# Altium PCB Electrode_Breakout.PcbDoc
Units mm, origin at the board's own origin, x right, y up, seen from the top; angles counter-clockwise.
Board outline 40.64 x 35.56 mm, 4 copper layers (Top, Ground Plane, Power Plane, Bottom), stack 1.562 mm thick; 7 components, 65 nets, 141 pads, 8 vias.
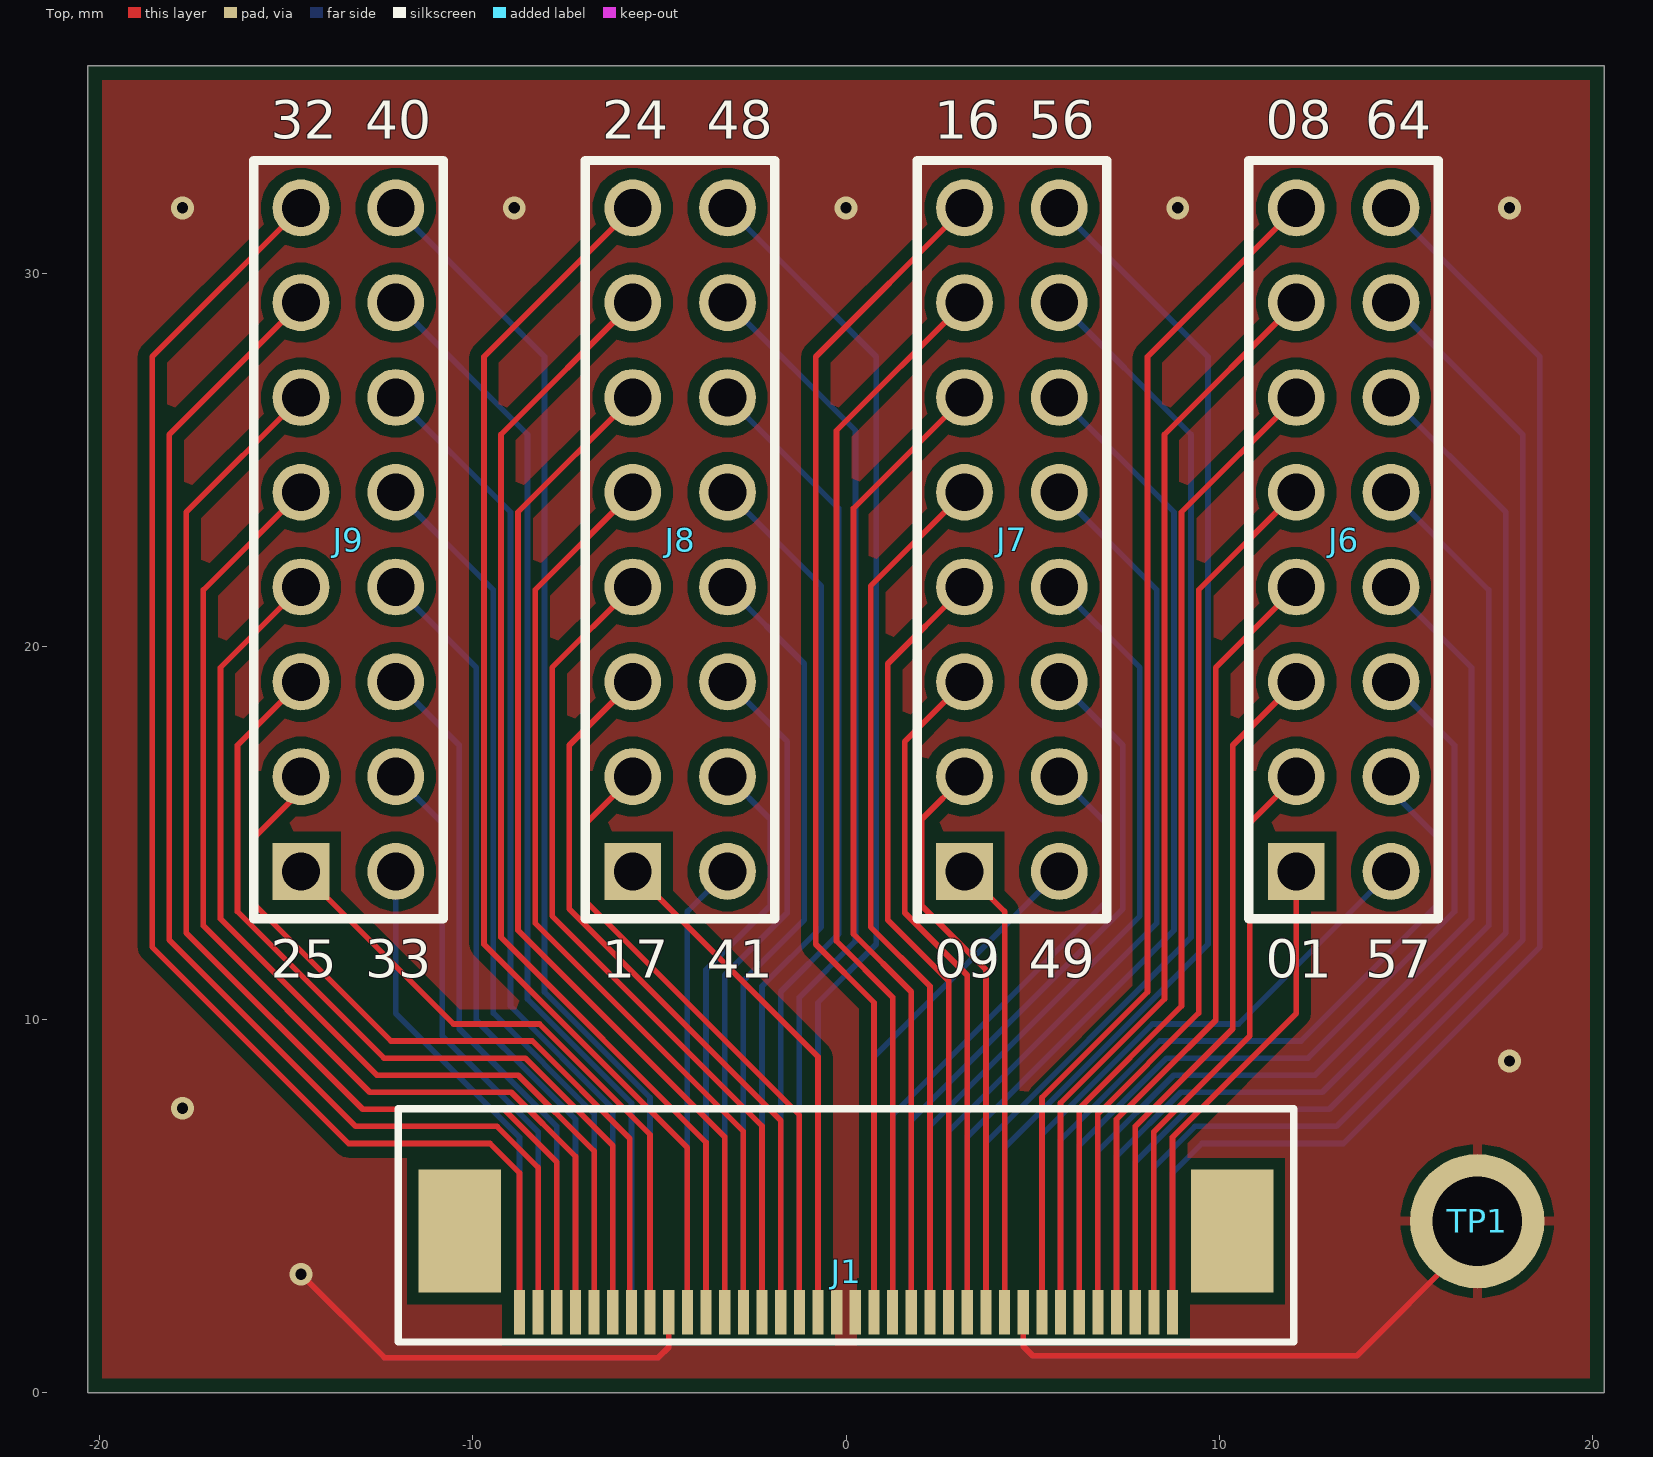
[diagram p0: Top view]
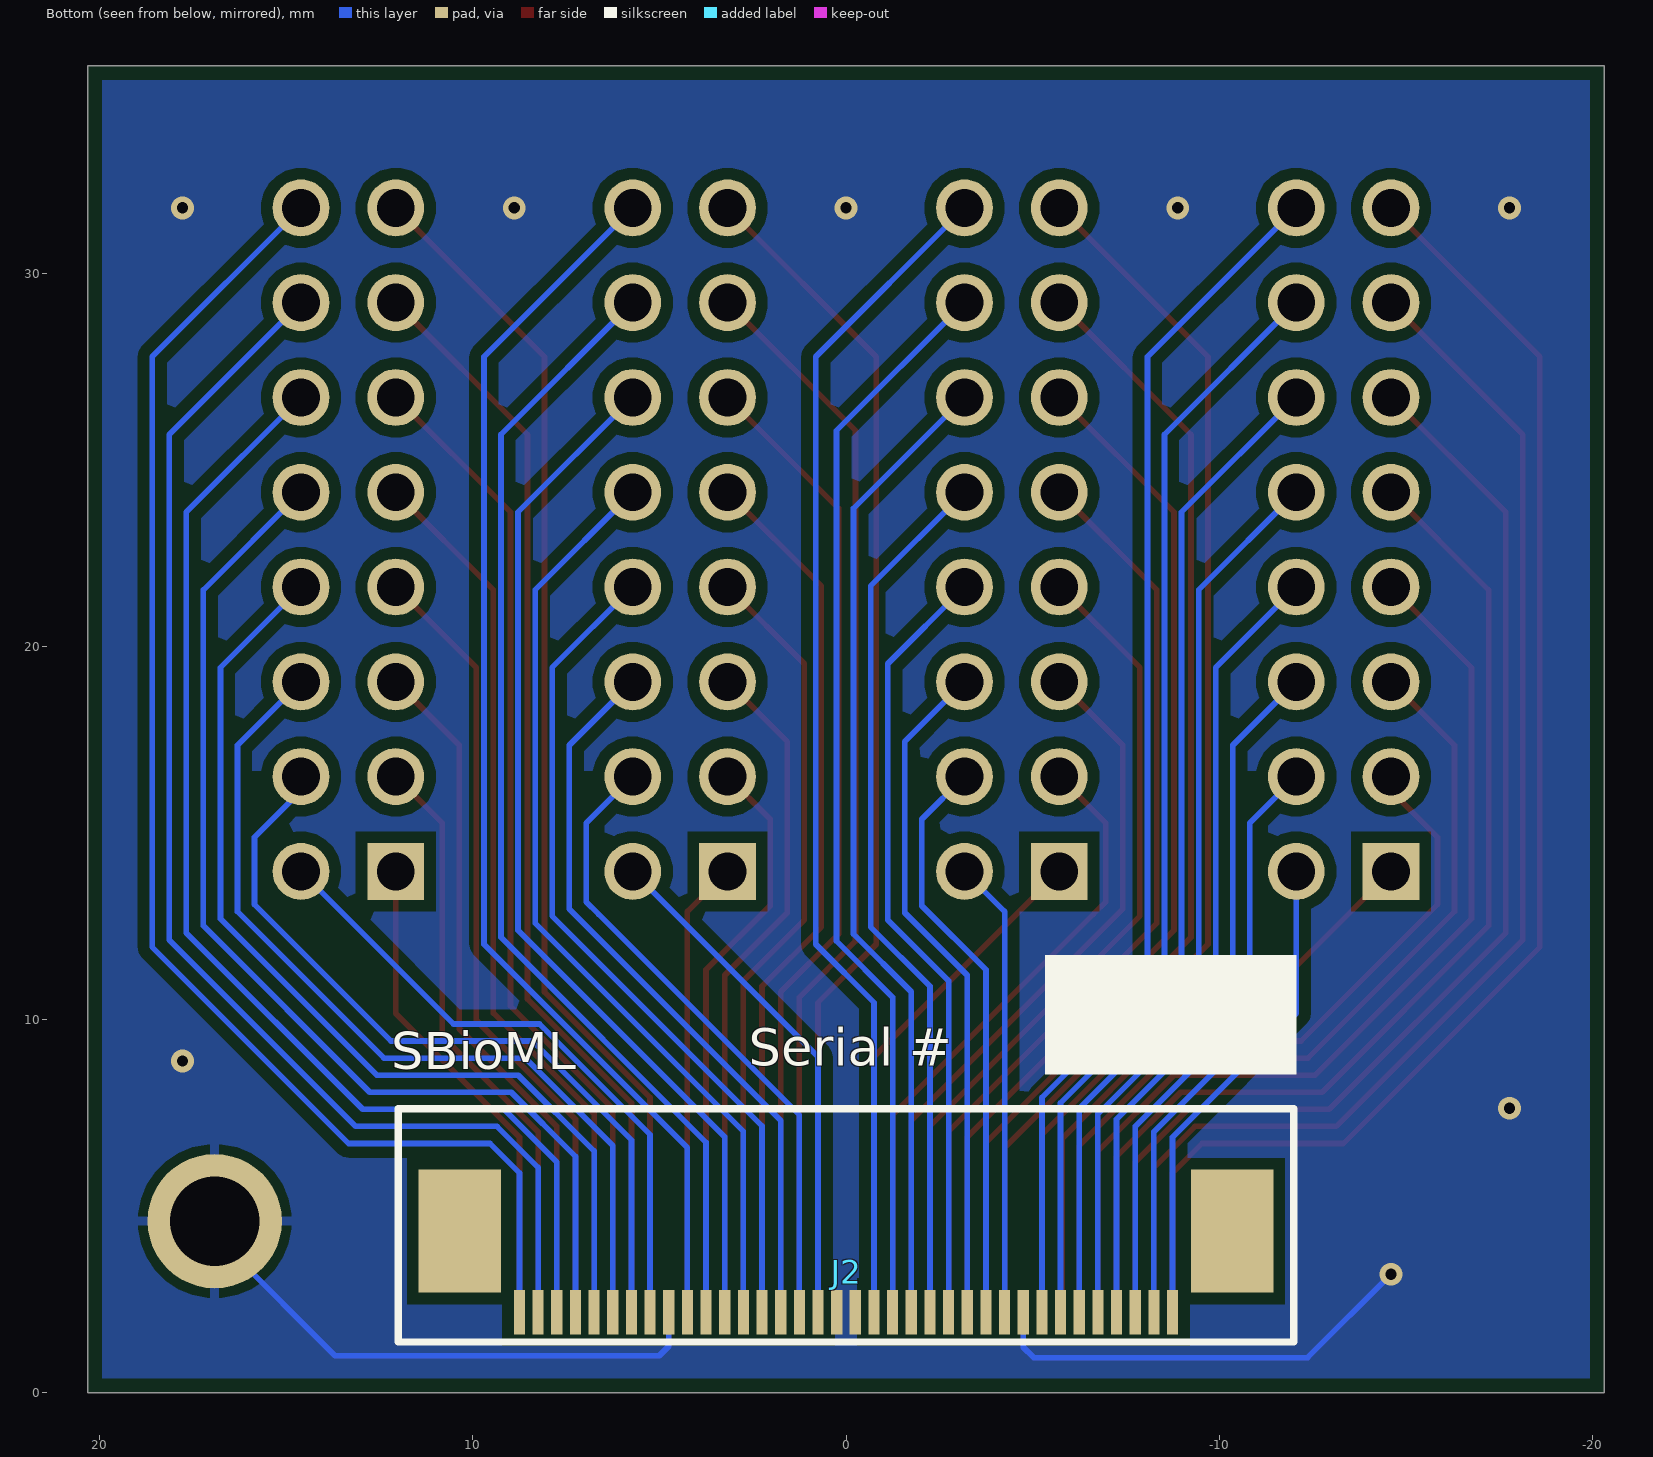
[diagram p1: Bottom view, seen from below]
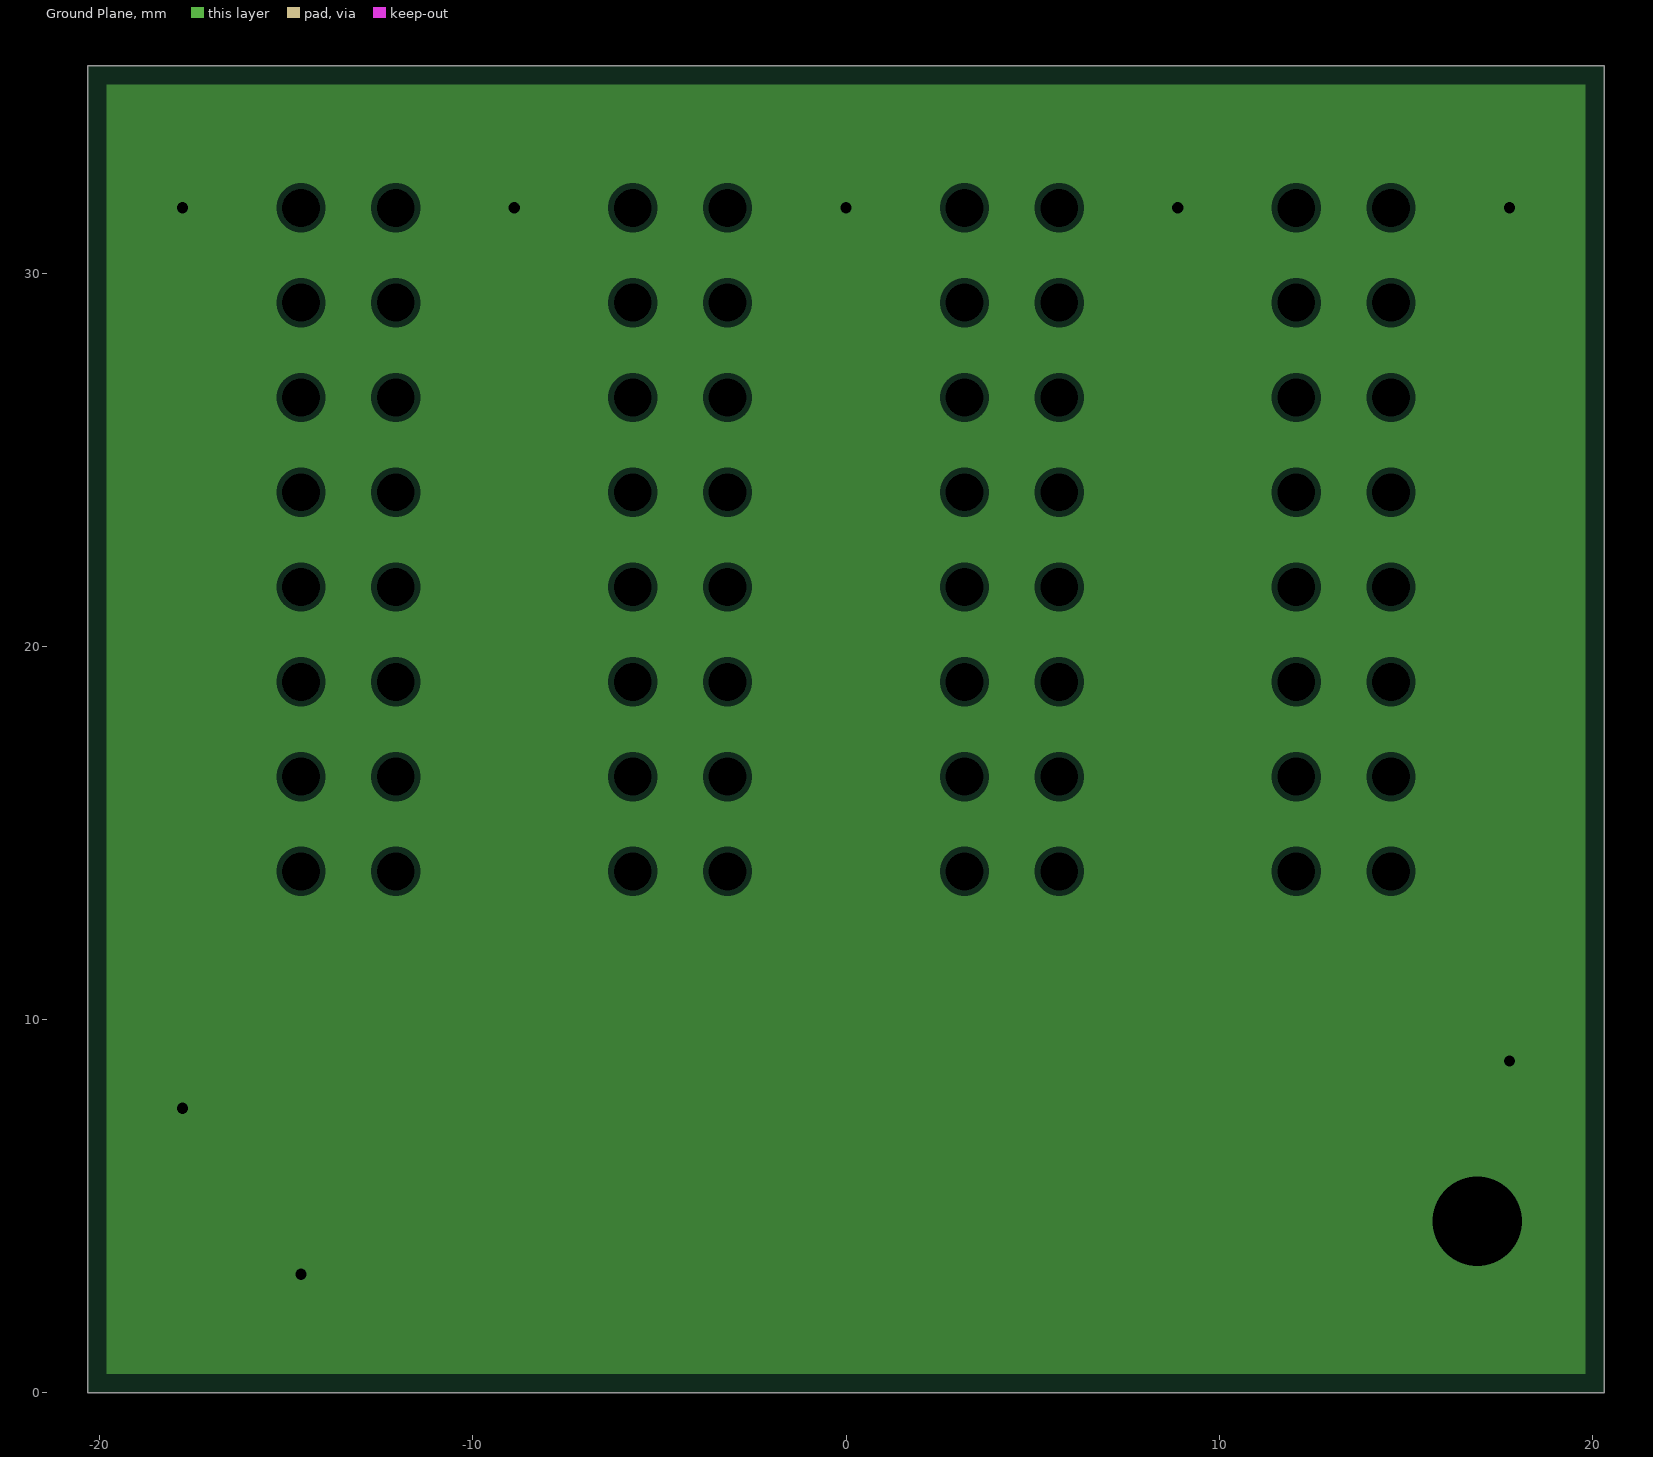
[diagram p2: Ground Plane, clearances drawn from the general rule]
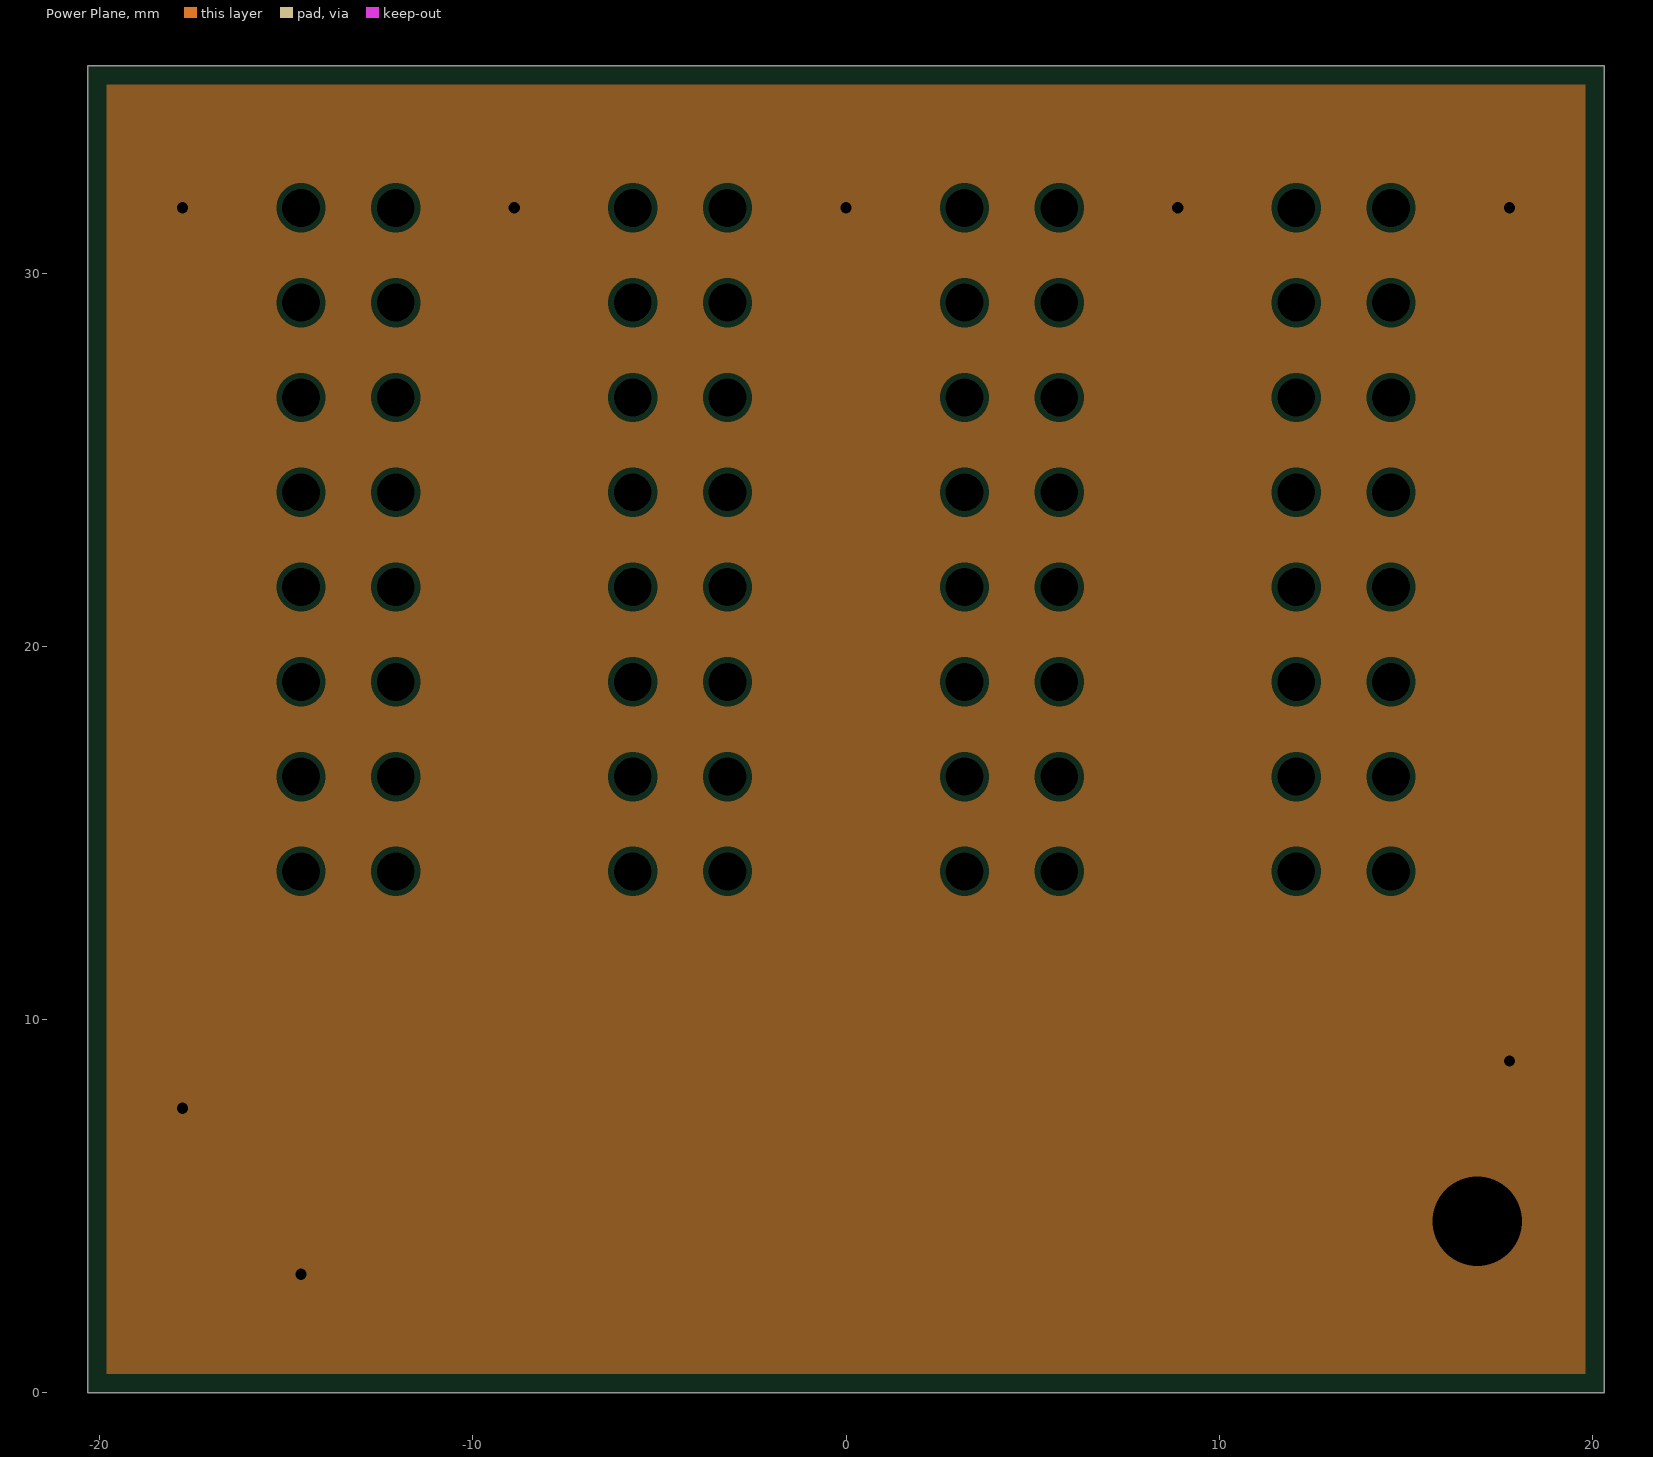
[diagram p3: Power Plane, clearances drawn from the general rule]

## Layer stack, top to bottom
Top Solder: solder mask 0.0102, Solder Resist, Dk 3.5
Top: signal copper 0.035
Dielectric 1: prepreg 0.196, FR-4, Dk 4.74
Ground Plane: plane copper 0.035, net REF
Dielectric 3: core 1.03, Dk 4.6
Power Plane: plane copper 0.035, net REF
Dielectric 4: prepreg 0.196, Dk 4.74
Bottom: signal copper 0.035
Bottom Solder: solder mask 0.0102, Solder Resist, Dk 3.5

## Board outline
-20.32,0 -20.32,35.56 20.32,35.56 20.32,0

## Design rules (kind name [scope] priority, off if disabled: settings)
BoardOutlineClearance [All] p1: gap=0.381 ignorepadtopadclearanceinfootprint=FALSE
Clearance [All] p1: gap=0.305 ignorepadtopadclearanceinfootprint=TRUE except(0.102: SMDPad-SMDPad; 0.203: Arc-SMDPad Track-SMDPad)
ComponentClearance [All] p1: gap=0.102 collisioncheckmode=3 verticalgap=0.102 showdistances=FALSE
HoleSize [All] p1: absolutevalues=TRUE maxlimit=25.4 minlimit=0.102 maxpercent=80.000 minpercent=20.000
HoleToHoleClearance [All] p1: gap=0.254 allowstackedmicrovias=FALSE
MinimumSolderMaskSliver [All] p1: minsoldermaskwidth=0.102
PlaneClearance [All] p1: clearance=0.152
PlaneConnect [All] p1: pad.planeconnectstyle=Relief pad.reliefexpansion=0.508 pad.reliefentries=4 pad.reliefconductorwidth=0.254 pad.reliefairgap=0.254 via.planeconnectstyle=Direct via.reliefexpansion=0.508 via.reliefentries=4 via.reliefconductorwidth=0.254 via.reliefairgap=0.254
PolygonConnect [All] p1: thpad.connectstyle=Relief thpad.reliefconductorwidth=0.254 thpad.reliefentries=4 thpad.polygonreliefangle="90 Angle" thpad.airgapwidth=0.254 smdpad.connectstyle=Direct smdpad.reliefconductorwidth=0.254 smdpad.reliefentries=4 smdpad.polygonreliefangle="90 Angle" smdpad.airgapwidth=0.254 via.connectstyle=Direct via.reliefconductorwidth=0.254 via.reliefentries=4 via.polygonreliefangle="90 Angle" via.airgapwidth=0.254
RoutingVias [All] p1: holewidth=0.305 width=0.61 viastyle="Through Hole" minholewidth=0.305 minwidth=0.61 maxholewidth=0.305 maxwidth=0.61
SilkToSilkClearance [All] p1: silktosilkclearance=0.102
SilkToSolderMaskClearance [IsPad] p1: minsilkscreentomaskgap=0.051 clearancetoexposedcopper=FALSE
SolderMaskExpansion [All] p1: expansion=0.051 istentingtop=FALSE
Width [All] p1: maxlimit=0.381 minlimit=0.152 preferedwidth=0.152 minimp=50.000000 maximp=50.000000 favimp=50.000000
22 further rules are at their usual default settings.

## Components (designator, comment, footprint, x,y, rotation, side; value= is the part's Value field where it differs from the comment)
J1 "3-2492104-6" CON_ZIF_RA_36POS 0,2.159 r180 top locked
J2 "3-2492104-6" CON_ZIF_RA_36POS 0,2.159 r0 bottom locked
J6 "CON_HEADER_16" CON_HEADER_16 13.335,22.86 r90 top locked
J7 "CON_HEADER_16" CON_HEADER_16 4.445,22.86 r90 top locked
J8 "CON_HEADER_16" CON_HEADER_16 -4.445,22.86 r90 top locked
J9 "CON_HEADER_16" CON_HEADER_16 -13.335,22.86 r90 top locked
TP1 "TP_Small" TP_Small_M2 16.916,4.597 r0 top

## Footprints (in the part's own frame and the unit in brackets; to place one, negate y for a bottom-side part, rotate by r counter-clockwise, add the part's x,y. Pads: shape width x height; smd on the part's side, far side on the other; paste and mask are expansions set on the pad)
CON_HEADER_16 [mil] "0.1\" pitch"
  rect 60x60 hole 40: 1(-350,50)
  round 60 hole 40: 2(-250,50) 3(-150,50) 4(-50,50) 5(50,50) 6(150,50) 7(250,50) 8(350,50) 9(350,-50) 10(250,-50) 11(150,-50) 12(50,-50) 13(-50,-50) 14(-150,-50) 15(-250,-50) 16(-350,-50)
  silkscreen extent -400,-100 400,100
CON_ZIF_RA_36POS [mm] "3-2492104-6 / 36 Position FPC Connector Contacts, Bottom 0.020\" (0.50mm) Surface Mount, Right Angle"
  rect 0.3x1.2 smd mask+0.025: 1(-8.75,0) 2(-8.25,0) 3(-7.75,0) 4(-7.25,0) 5(-6.75,0) 6(-6.25,0) 7(-5.75,0) 8(-5.25,0) 9(-4.75,0) 10(-4.25,0) 11(-3.75,0) 12(-3.25,0) 13(-2.75,0) 14(-2.25,0) 15(-1.75,0) 16(-1.25,0) 17(-0.75,0) 18(-0.25,0) 19(0.25,0) 20(0.75,0) 21(1.25,0) 22(1.75,0) 23(2.25,0) 24(2.75,0) 25(3.25,0) 26(3.75,0) 27(4.25,0) 28(4.75,0) 29(5.25,0) 30(5.75,0) 31(6.25,0) 32(6.75,0) 33(7.25,0) 34(7.75,0) 35(8.25,0) 36(8.75,0)
  rect 2.2x3.3 smd mask+0.025: M1(-10.35,-2.17) M2(10.35,-2.17)
  silkscreen extent -12,-5.45 12,0.8
TP_Small_M2 [mm]
  round 3.6 hole 2.4: 1(0,0)

## Part data
J1 J2: library part CON_ZIF_RA_36POS, "36 Position FPC Connector Contacts, Bottom 0.020\" (0.50mm) Surface Mount, Right Angle", GRAMS Lib Spec=2.7

## Via types
v1: diameter 0.61, hole 0.305, Top to Bottom, 8 vias

## Nets (pads, with @x,y where several pads share a name; then routed paths per layer and width w, separated by ;. In a path a pad name is that pad's centre, name@x,y a point inside that pad or via, vN(x,y) a via of type N, cw(c..) or ccw(c..) an arc to the next point about the centre after c; other vN are vias at no path point)
INPUT_01: J1.1 J6.1 | length 13.2
  Top w0.152: J1.1 8.75,6.845 12.065,10.16 J6.1
INPUT_02: J1.2 J6.2 | length 15.9
  Top w0.152: J1.2 8.25,6.992 10.82,9.562 10.82,15.265 J6.2
INPUT_03: J1.3 J6.3 | length 18.7
  Top w0.152: J1.3 7.75,7.138 10.363,9.751 10.363,17.348 J6.3
INPUT_04: J1.4 J6.4 | length 21.4
  Top w0.152: J1.4 7.25,7.326 8.382,8.458 9.906,9.982 9.906,19.431 J6.4
INPUT_05: J1.5 J6.5 | length 24.2
  Top w0.152: J1.5 6.75,7.473 9.449,10.172 9.449,21.514 J6.5
INPUT_06: J1.6 J6.6 | length 26.9
  Top w0.152: J1.6 6.25,7.619 8.992,10.361 8.992,23.597 J6.6
INPUT_07: J1.7 J6.7 | length 29.7
  Top w0.152: J1.7 5.75,7.766 8.534,10.55 8.534,25.679 J6.7
INPUT_08: J1.8 J6.8 | length 32.4
  Top w0.152: J1.8 5.25,7.913 8.077,10.74 8.077,27.762 J6.8
INPUT_09: J1.10 J7.1 | length 12.3
  Top w0.152: J7.1 4.25,12.895 J1.10
INPUT_10: J1.11 J7.2 | length 15.5
  Top w0.152: J7.2 2.032,15.367 2.032,13.05 3.75,11.332 J1.11
INPUT_11: J1.12 J7.3 | length 18.2
  Top w0.152: J7.3 1.575,17.45 1.575,12.861 3.25,11.186 J1.12
INPUT_12: J1.13 J7.4 | length 21
  Top w0.152: J1.13 2.75,11.039 1.118,12.671 1.118,19.533 J7.4
INPUT_13: J1.14 J7.5 | length 23.7
  Top w0.152: J1.14 2.25,10.892 0.66,12.482 0.66,21.615 J7.5
INPUT_14: J1.15 J7.6 | length 26.4
  Top w0.152: J1.15 1.75,10.746 0.203,12.293 0.203,23.698 J7.6
INPUT_15: J1.16 J7.7 | length 29.1
  Top w0.152: J1.16 1.25,6.507 1.25,10.599 -0.254,12.103 -0.254,25.781 J7.7
INPUT_16: J1.17 J7.8 | length 31.9
  Top w0.152: J1.17 0.75,10.453 -0.813,12.016 -0.813,12.37 -0.813,27.762 J7.8
INPUT_17: J1.20 J8.1 | length 13.9
  Top w0.152: J8.1 -0.75,9.005 J1.20
INPUT_18: J1.21 J8.2 | length 17.2
  Top w0.152: J8.2 -6.96,15.265 -6.96,13.404 -6.96,13.152 -6.635,12.827 -1.25,7.442 J1.21
INPUT_19: J1.22 J8.3 | length 19.9
  Top w0.152: J8.3 -7.417,17.348 -7.417,12.962 -1.75,7.296 J1.22
INPUT_20: J1.23 J8.4 | length 22.7
  Top w0.152: J8.4 -7.874,19.431 -7.874,12.773 -2.25,7.149 J1.23
INPUT_21: J1.24 J8.5 | length 25.4
  Top w0.152: J8.5 -8.331,21.514 -8.331,12.584 -2.75,7.002 J1.24
INPUT_22: J1.25 J8.6 | length 28.1
  Top w0.152: J8.6 -8.788,23.597 -8.788,12.394 -3.25,6.856 J1.25
INPUT_23: J1.26 J8.7 | length 30.8
  Top w0.152: J8.7 -9.246,25.679 -9.246,12.205 -3.75,6.709 J1.26
INPUT_24: J1.27 J8.8 | length 33.5
  Top w0.152: J8.8 -9.703,27.762 -9.703,12.016 -4.25,6.563 J1.27
INPUT_25: J1.29 J9.1 | length 17
  Top w0.152: J9.1 -10.516,9.881 -8.214,9.881 -5.25,6.916 J1.29
INPUT_26: J1.30 J9.2 | length 21.3
  Top w0.152: J9.2 -14.605,16.131 -15.85,14.886 -15.85,13.081 -12.192,9.423 -8.404,9.423 -5.793,6.812 -5.793,2.202 J1.30
INPUT_27: J1.31 J9.3 | length 24
  Top w0.152: J9.3 -16.307,17.348 -16.307,14.485 -16.307,12.891 -12.382,8.966 -8.593,8.966 -6.25,6.623 J1.31
INPUT_28: J1.32 J9.4 | length 26.7
  Top w0.152: J9.4 -16.764,19.431 -16.764,14.295 -16.764,12.702 -12.571,8.509 -8.783,8.509 -6.75,6.476 J1.32
INPUT_29: J1.33 J9.5 | length 29.4
  Top w0.152: J9.5 -17.221,21.514 -17.221,14.106 -17.221,12.513 -12.76,8.052 -8.972,8.052 -7.25,6.33 J1.33
INPUT_30: J1.34 J9.6 | length 32.1
  Top w0.152: J9.6 -17.678,23.597 -17.678,13.917 -17.678,12.323 -12.95,7.595 -9.161,7.595 -7.75,6.183 J1.34
INPUT_31: J1.35 J9.7 | length 34.8
  Top w0.152: J9.7 -18.136,25.679 -18.136,13.538 -18.136,12.134 -13.139,7.137 -9.351,7.137 -8.25,6.037 J1.35
INPUT_32: J1.36 J9.8 | length 37.5
  Top w0.152: J9.8 -18.593,27.762 -18.593,11.944 -13.329,6.68 -11.158,6.68 -9.54,6.68 -8.75,5.89 J1.36
INPUT_33: J2.1 J9.16 | length 13.2
  Bottom w0.152: J9.16 -12.065,10.16 -8.75,6.845 J2.1
INPUT_34: J2.2 J9.15 | length 15.9
  Bottom w0.152: J9.15 -10.82,15.265 -10.82,9.562 -8.25,6.992 J2.2
INPUT_35: J2.3 J9.14 | length 18.7
  Bottom w0.152: J9.14 -10.363,17.348 -10.363,9.751 -7.75,7.138 J2.3
INPUT_36: J2.4 J9.13 | length 21.4
  Bottom w0.152: J9.13 -9.906,19.431 -9.906,9.982 -8.382,8.458 -7.25,7.326 J2.4
INPUT_37: J2.5 J9.12 | length 24.2
  Bottom w0.152: J9.12 -9.449,21.514 -9.449,10.172 -6.75,7.473 J2.5
INPUT_38: J2.6 J9.11 | length 26.9
  Bottom w0.152: J9.11 -8.992,23.597 -8.992,10.361 -6.25,7.619 J2.6
INPUT_39: J2.7 J9.10 | length 29.7
  Bottom w0.152: J9.10 -8.534,25.679 -8.534,10.55 -5.75,7.766 J2.7
INPUT_40: J2.8 J9.9 | length 32.4
  Bottom w0.152: J9.9 -8.077,27.762 -8.077,10.74 -5.25,7.913 J2.8
INPUT_41: J2.10 J8.16 | length 12.3
  Bottom w0.152: J2.10 -4.25,12.895 J8.16
INPUT_42: J2.11 J8.15 | length 15.5
  Bottom w0.152: J2.11 -3.75,11.332 -2.032,13.05 -2.032,15.367 J8.15
INPUT_43: J2.12 J8.14 | length 18.2
  Bottom w0.152: J2.12 -3.25,11.186 -1.575,12.861 -1.575,17.45 J8.14
INPUT_44: J2.13 J8.13 | length 21
  Bottom w0.152: J8.13 -1.118,19.533 -1.118,12.671 -2.75,11.039 J2.13
INPUT_45: J2.14 J8.12 | length 23.7
  Bottom w0.152: J8.12 -0.66,21.615 -0.66,12.482 -2.25,10.892 J2.14
INPUT_46: J2.15 J8.11 | length 26.4
  Bottom w0.152: J8.11 -0.203,23.698 -0.203,12.293 -1.75,10.746 J2.15
INPUT_47: J2.16 J8.10 | length 29.1
  Bottom w0.152: J8.10 0.254,25.781 0.254,12.103 -1.25,10.599 -1.25,6.507 J2.16
INPUT_48: J2.17 J8.9 | length 31.9
  Bottom w0.152: J8.9 0.813,27.762 0.813,12.37 0.813,12.016 -0.75,10.453 J2.17
INPUT_49: J2.20 J7.16 | length 13.9
  Bottom w0.152: J2.20 0.75,9.005 J7.16
INPUT_50: J2.21 J7.15 | length 17.2
  Bottom w0.152: J2.21 1.25,7.442 6.635,12.827 6.96,13.152 6.96,13.404 6.96,15.265 J7.15
INPUT_51: J2.22 J7.14 | length 19.9
  Bottom w0.152: J2.22 1.75,7.296 7.417,12.962 7.417,17.348 J7.14
INPUT_52: J2.23 J7.13 | length 22.7
  Bottom w0.152: J2.23 2.25,7.149 7.874,12.773 7.874,19.431 J7.13
INPUT_53: J2.24 J7.12 | length 25.4
  Bottom w0.152: J2.24 2.75,7.002 8.331,12.584 8.331,21.514 J7.12
INPUT_54: J2.25 J7.11 | length 28.1
  Bottom w0.152: J2.25 3.25,6.856 8.788,12.394 8.788,23.597 J7.11
INPUT_55: J2.26 J7.10 | length 30.8
  Bottom w0.152: J2.26 3.75,6.709 9.246,12.205 9.246,25.679 J7.10
INPUT_56: J2.27 J7.9 | length 33.5
  Bottom w0.152: J2.27 4.25,6.563 9.703,12.016 9.703,27.762 J7.9
INPUT_57: J2.29 J6.16 | length 17
  Bottom w0.152: J2.29 5.25,6.916 8.214,9.881 10.516,9.881 J6.16
INPUT_58: J2.30 J6.15 | length 21.3
  Bottom w0.152: J2.30 5.75,6.77 8.404,9.423 12.192,9.423 15.85,13.081 15.85,14.886 14.605,16.131 J6.15
INPUT_59: J2.31 J6.14 | length 24
  Bottom w0.152: J2.31 6.25,6.623 8.593,8.966 12.382,8.966 16.307,12.891 16.307,14.485 16.307,17.348 J6.14
INPUT_60: J2.32 J6.13 | length 26.7
  Bottom w0.152: J2.32 6.75,6.476 8.783,8.509 12.571,8.509 16.764,12.702 16.764,14.295 16.764,19.431 J6.13
INPUT_61: J2.33 J6.12 | length 29.4
  Bottom w0.152: J2.33 7.25,6.33 8.972,8.052 12.76,8.052 17.221,12.513 17.221,14.106 17.221,21.514 J6.12
INPUT_62: J2.34 J6.11 | length 32.1
  Bottom w0.152: J2.34 7.75,6.183 9.161,7.595 12.95,7.595 17.678,12.323 17.678,13.917 17.678,23.597 J6.11
INPUT_63: J2.35 J6.10 | length 34.8
  Bottom w0.152: J2.35 8.25,6.037 9.351,7.137 13.139,7.137 18.136,12.134 18.136,13.538 18.136,25.679 J6.10
INPUT_64: J2.36 J6.9 | length 37.5
  Bottom w0.152: J2.36 8.75,5.89 9.54,6.68 11.158,6.68 13.329,6.68 18.593,11.944 18.593,27.762 J6.9
REF: J1.9 J1.18 J1.19 J1.28 J2.9 J2.18 J2.19 J2.28 TP1.1 | length 51.6
  Top w0.152: v1(-14.605,3.175) -12.37,0.94 -5.029,0.94 -4.75,1.219 J1.28 ; J1.9 4.75,1.244 5.004,0.991 13.691,0.991 TP1.1@16.51,3.81
  Bottom w0.152: v1(-14.605,3.175) -12.37,0.94 -5.029,0.94 -4.75,1.219 J2.9 ; J2.28 4.75,1.244 5.004,0.991 13.691,0.991 TP1.1@16.51,3.81
  other v1: -17.78,7.62 17.78,8.89 -17.78,31.75 -8.89,31.75 0,31.75 8.89,31.75 17.78,31.75
pads on no net: J1.M1 J1.M2 J2.M1 J2.M2

## Polygon pours and split planes (outlines as drawn)
REF on Bottom "REF_BOT" (solid, remove dead copper, pour order 1): -20.32,0 -20.32,35.56 20.32,35.56 20.32,0
REF on Top "REF_TOP" (solid, remove dead copper, pour order 0): -20.32,0 -20.32,35.56 20.32,35.56 20.32,0
REF on Power Plane (split plane): 19.81,0.51 -19.81,0.51 -19.81,35.05 19.81,35.05
REF on Ground Plane (split plane): 19.81,0.51 -19.81,0.51 -19.81,35.05 19.81,35.05

## Silkscreen, mask and mechanical layers (free items; w line width, h text height)
Top Overlay:
  text "32" at -15.418,33.604 h1.02
  text "40" at -12.878,33.604 h1.02
  text "24" at -6.528,33.604 h1.02
  text "48" at -3.734,33.604 h1.02
  text "16" at 2.362,33.604 h1.02
  text "56" at 4.902,33.604 h1.02
  text "08" at 11.252,33.604 h1.02
  text "64" at 13.919,33.604 h1.02
  text "25" at -15.418,11.125 h1.02
  text "33" at -12.878,11.125 h1.02
  text "17" at -6.528,11.125 h1.02
  text "41" at -3.734,11.125 h1.02
  text "09" at 2.362,11.125 h1.02
  text "49" at 4.902,11.125 h1.02
  text "01" at 11.252,11.125 h1.02
  text "57" at 13.919,11.125 h1.02
Bottom Overlay:
  rectangle: -12.077,8.528 -5.338,11.728
  text "Serial #" at 2.605,8.763 h1
  text "SBioML" at 12.18,8.675 h1
Board Outline:
  the board outline again, w0.254